# Altium PCB ledcube8x8x8.PcbDoc
Units mil, origin at the board's own origin, x right, y up, seen from the top; angles counter-clockwise.
Board outline 3840 x 2665 mil, 2 copper layers (Top Layer, Bottom Layer); 126 components, 182 nets, 509 pads, 79 vias.
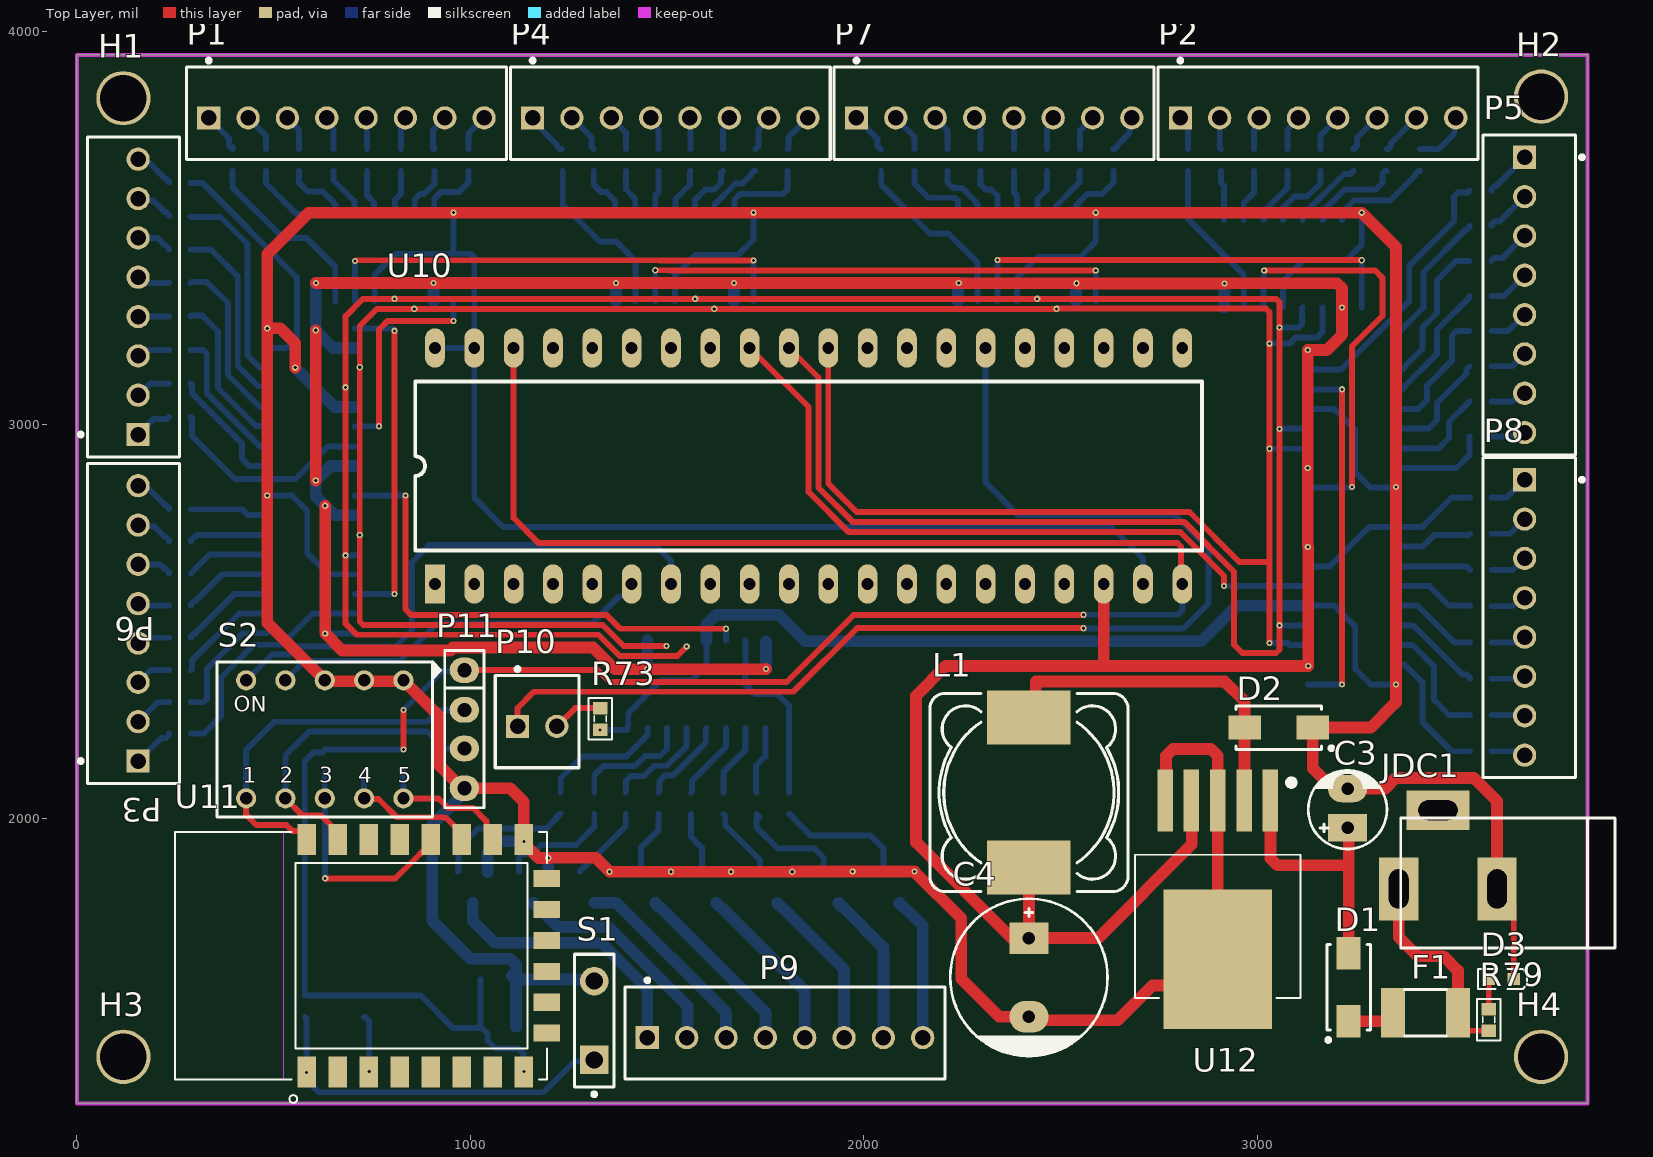
[diagram p0: Top Layer view]
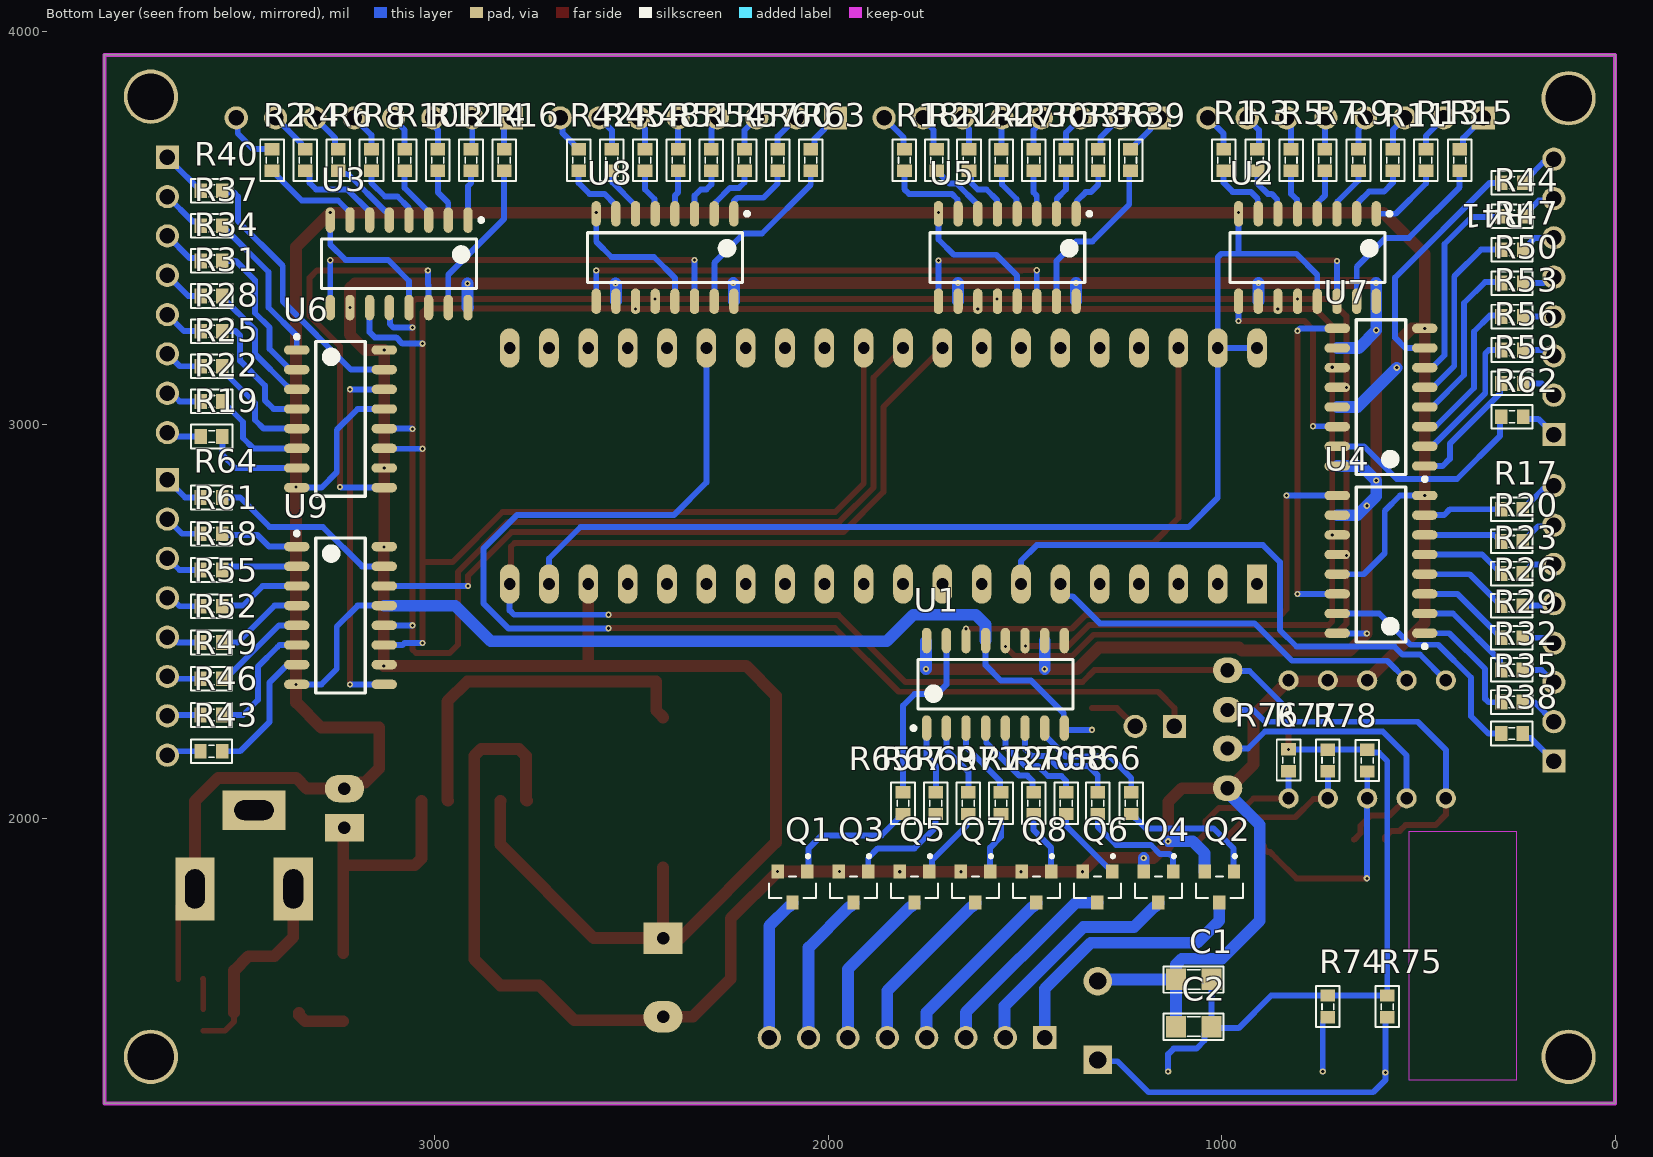
[diagram p1: Bottom Layer view, seen from below]
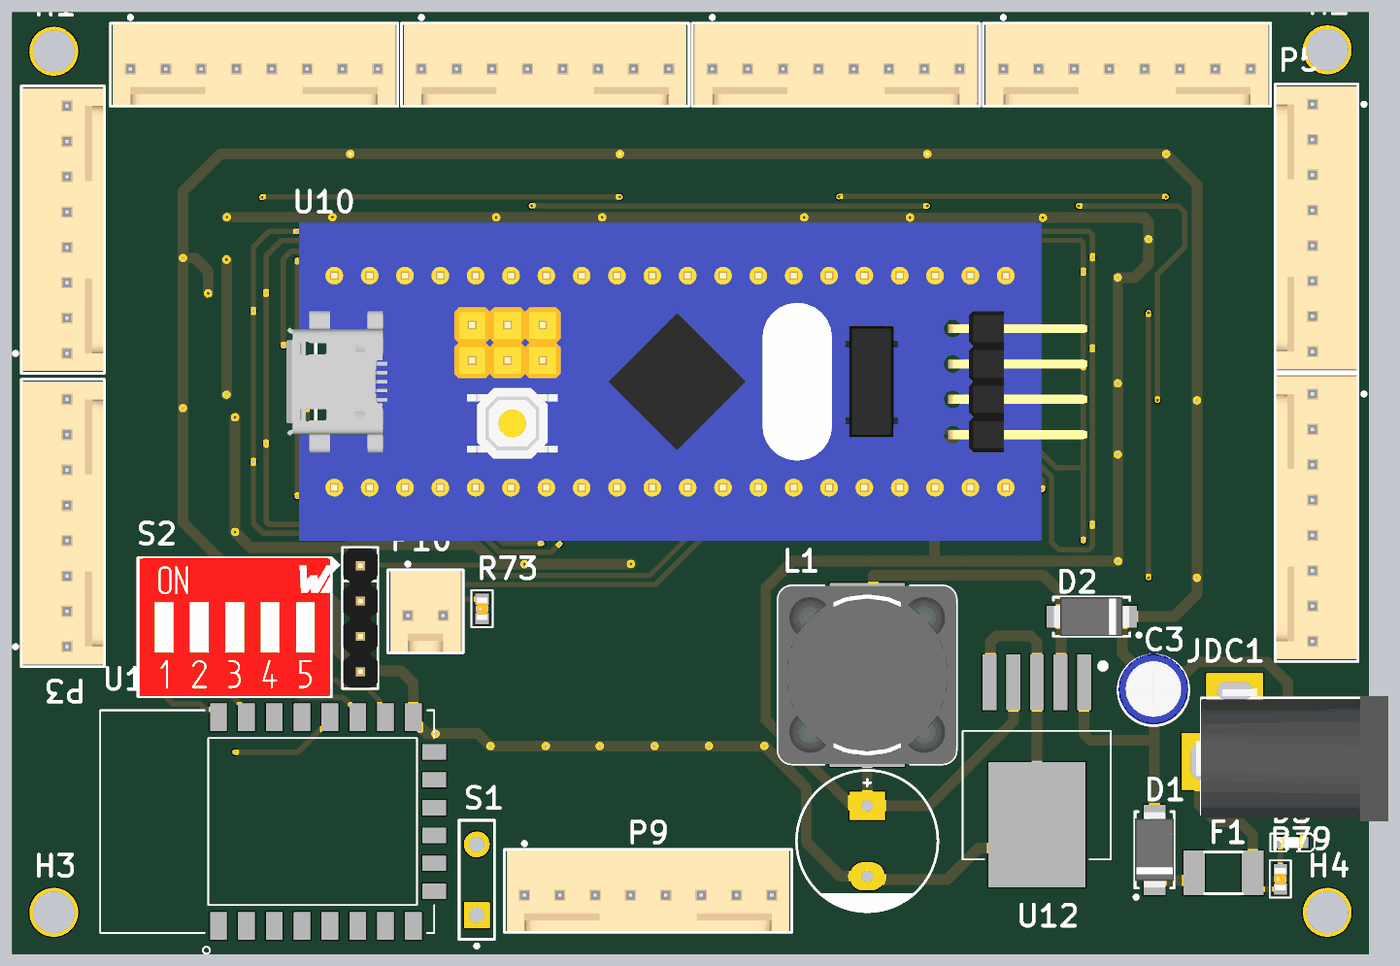
[diagram p2: 3D render of the assembled board from above, using the file's embedded part models]
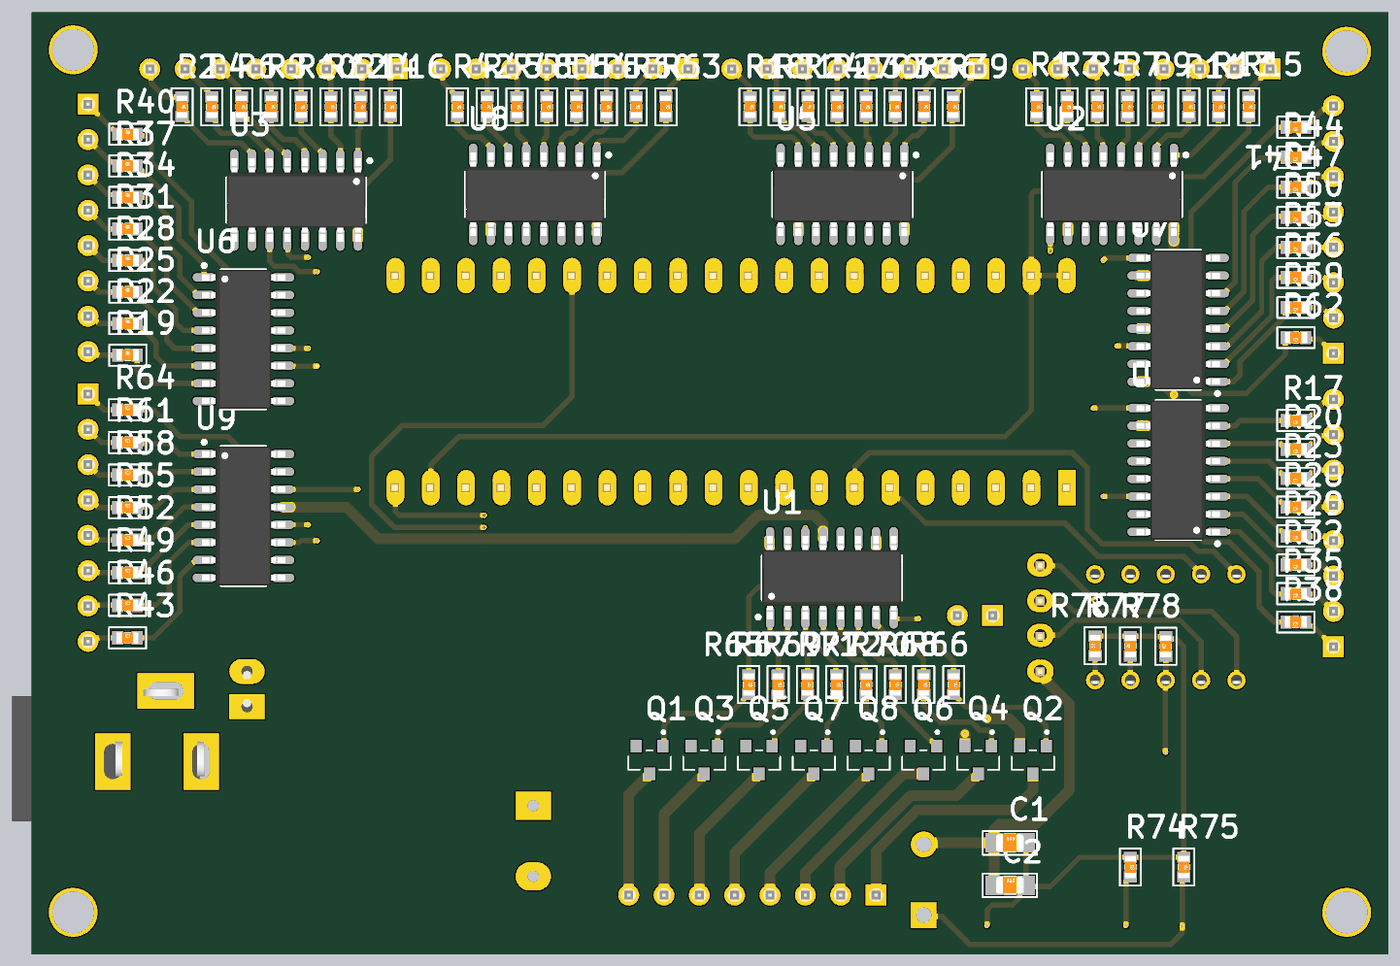
[diagram p3: 3D render of the assembled board from below, using the file's embedded part models]

## Layer stack, top to bottom
Top Solder: solder mask 0.4, Solder Resist, Dk 3.5
Top Layer: signal copper 1.4
Dielectric 1: dielectric 12.6, FR-4, Dk 4.8
Bottom Layer: signal copper 1.4
Bottom Solder: solder mask 0.4, Solder Resist, Dk 3.5

## Board outline
0,1275 0,3940 3840,3940 3840,1275

## Design rules (kind name [scope] priority, off if disabled: settings)
Clearance [All] p1: gap=10 ignorepadtopadclearanceinfootprint=FALSE
PolygonConnect [All] p1: connectstyle=Relief reliefconductorwidth=10 reliefentries=4 polygonreliefangle="90 Angle" airgapwidth=10
RoutingVias [All] p1: holewidth=7.87 width=15.75 viastyle="Through Hole" minholewidth=0 minwidth=7.87 maxholewidth=28 maxwidth=50
SolderMaskExpansion [All] p1: expansion=4 istentingtop=FALSE
Width [All] p1: maxlimit=30 minlimit=8 preferedwidth=15
30 further rules are at their usual default settings.

## Classes and differential pairs
component class power_supply: C3 C4 D1 D2 D3 F1 JDC1 L1 R79 U12
component class esp8266: C1 C2 IC*1 P11 R74 R75 R76 R77 R78 S1 S2 U11
component class ledcube8x8x8: H1 H2 H3 H4 P1 P2 P3 P4 P5 P6 P7 P8 P9 P10 Q1 Q2 Q3 Q4 Q5 Q6 Q7 Q8 R1 R2 R3 R4 R5 R6 R7 R8 R9 R10 R11 R12 R13 R14 R15 R16 R17 R18 R19 R20 R21 R22 R23 R24 R25 R26 R27 R28 R29 R30 R31 R32 R33 R34 R35 R36 R37 R38 R39 R40 R41 R42 R43 R44 R45 R46 R47 R48 R49 R50 R51 R52 R53 R54 R55 R56 R57 R58 R59 R60 R61 R62 R63 R64 R65 R66 R67 R68 R69 R70 R71 R72 R73 U1 U2 U3 U4 U5 U6 U7 U8 U9 U10

## Components (designator, comment, footprint, x,y, rotation, side; value= is the part's Value field where it differs from the comment)
C1 "Cap Non-Pol SMD" CAP-SM-0805 1115.94,1590 r180 bottom value=100nF
C2 "Cap Non-Pol SMD" CAP-SM-0805 1115.94,1470 r180 bottom value=1uF
C3 "Cap Pol" CP1/2 3230,1975 r90 top value=100uF
C4 "Cap Pol" CP2/4 2420,1695 r270 top value=1000uF
D1 "D Schottky" SS34 3233,1570 r90 top
D2 "D Schottky" SS34 3055,2230 r180 top
D3 "LED SMD" LED_0603_Blue 3621,1591 r0 top
F1 "Fuse" "FUSE SMD" 3428,1505 r180 top
H1 "Hole" "LO KHOAN 3MM" 118.11,3830 r0 top
H2 "Hole" "LO KHOAN 3MM" 3721.89,3834.06 r0 top
H3 "Hole" "LO KHOAN 3MM" 118.11,1393.11 r0 top
H4 "Hole" "LO KHOAN 3MM" 3721.89,1393.11 r0 top
JDC1 "Jack DC" DC-IN 3485,1920 r180 top value="Jac DC"
L1 "Inductor" "INDUCTOR 12.5x12.5" 2420,2065 r270 top value=100uH
P1 "61900811121" 61900811121 685,3791.81 r180 top
P2 "61900811121" 61900811121 3155,3791.81 r180 top
P3 "61900811121" 61900811121 143.7,2495 r270 top
P4 "61900811121" 61900811121 1508.33,3791.81 r180 top
P5 "61900811121" 61900811121 3691.81,3330 r90 top
P6 "61900811121" 61900811121 143.7,3325 r270 top
P7 "61900811121" 61900811121 2331.67,3791.81 r180 top
P8 "61900811121" 61900811121 3691.81,2510 r90 top
P9 "61900811121" 61900811121 1800,1453.81 r180 top
P10 "61900211121" 61900211121 1170,2245 r180 top
P11 "Header 4" JP4 985,2276 r270 top
Q1 "MMSS8050-H-TP" TRANS_MMSS8050-H-TP 2090.94,1824.37 r270 bottom
Q2 "MMSS8050-H-TP" TRANS_MMSS8050-H-TP 1005.94,1824.37 r270 bottom
Q3 "MMSS8050-H-TP" TRANS_MMSS8050-H-TP 1935.94,1824.37 r270 bottom
Q4 "MMSS8050-H-TP" TRANS_MMSS8050-H-TP 1160.94,1824.37 r270 bottom
Q5 "MMSS8050-H-TP" TRANS_MMSS8050-H-TP 1780.94,1824.37 r270 bottom
Q6 "MMSS8050-H-TP" TRANS_MMSS8050-H-TP 1315.94,1824.37 r270 bottom
Q7 "MMSS8050-H-TP" TRANS_MMSS8050-H-TP 1625.94,1824.37 r270 bottom
Q8 "MMSS8050-H-TP" TRANS_MMSS8050-H-TP 1470.94,1824.37 r270 bottom
R1 "RESISTOR SMD" RES-SM-0603 995,3700 r270 bottom value=220
R2 "RESISTOR SMD" RES-SM-0603 3414,3700 r270 bottom value=220
R3 "RESISTOR SMD" RES-SM-0603 909.29,3700 r270 bottom value=220
R4 "RESISTOR SMD" RES-SM-0603 3329.71,3700 r270 bottom value=220
R5 "RESISTOR SMD" RES-SM-0603 823.57,3700 r270 bottom value=220
R6 "RESISTOR SMD" RES-SM-0603 3245.43,3700 r270 bottom value=220
R7 "RESISTOR SMD" RES-SM-0603 737.86,3700 r270 bottom value=220
R8 "RESISTOR SMD" RES-SM-0603 3161.14,3700 r270 bottom value=220
R9 "RESISTOR SMD" RES-SM-0603 652.14,3700 r270 bottom value=220
R10 "RESISTOR SMD" RES-SM-0603 3076.86,3700 r270 bottom value=220
R11 "RESISTOR SMD" RES-SM-0603 565,3700 r270 bottom value=220
R12 "RESISTOR SMD" RES-SM-0603 2992.57,3700 r270 bottom value=220
R13 "RESISTOR SMD" RES-SM-0603 480.71,3700 r270 bottom value=220
R14 "RESISTOR SMD" RES-SM-0603 2908.29,3700 r270 bottom value=220
R15 "RESISTOR SMD" RES-SM-0603 395,3700 r270 bottom value=220
R16 "RESISTOR SMD" RES-SM-0603 2824,3700 r270 bottom value=220
R17 "RESISTOR SMD" RES-SM-0603 235,2785 r0 bottom value=220
R18 "RESISTOR SMD" RES-SM-0603 1806.52,3700 r270 bottom value=220
R19 "RESISTOR SMD" RES-SM-0603 3595,2970 r180 bottom value=220
R20 "RESISTOR SMD" RES-SM-0603 235,2703.33 r0 bottom value=220
R21 "RESISTOR SMD" RES-SM-0603 1724.38,3700 r270 bottom value=220
R22 "RESISTOR SMD" RES-SM-0603 3595,3059.29 r180 bottom value=220
R23 "RESISTOR SMD" RES-SM-0603 235,2621.67 r0 bottom value=220
R24 "RESISTOR SMD" RES-SM-0603 1642.24,3700 r270 bottom value=220
R25 "RESISTOR SMD" RES-SM-0603 3595,3148.57 r180 bottom value=220
R26 "RESISTOR SMD" RES-SM-0603 235,2540 r0 bottom value=220
R27 "RESISTOR SMD" RES-SM-0603 1560.1,3700 r270 bottom value=220
R28 "RESISTOR SMD" RES-SM-0603 3595,3237.86 r180 bottom value=220
R29 "RESISTOR SMD" RES-SM-0603 235,2458.33 r0 bottom value=220
R30 "RESISTOR SMD" RES-SM-0603 1477.95,3700 r270 bottom value=220
R31 "RESISTOR SMD" RES-SM-0603 3595,3327.14 r180 bottom value=220
R32 "RESISTOR SMD" RES-SM-0603 235,2376.67 r0 bottom value=220
R33 "RESISTOR SMD" RES-SM-0603 1395.81,3700 r270 bottom value=220
R34 "RESISTOR SMD" RES-SM-0603 3595,3416.43 r180 bottom value=220
R35 "RESISTOR SMD" RES-SM-0603 235,2295 r0 bottom value=220
R36 "RESISTOR SMD" RES-SM-0603 1313.67,3700 r270 bottom value=220
R37 "RESISTOR SMD" RES-SM-0603 3595,3505.71 r180 bottom value=220
R38 "RESISTOR SMD" RES-SM-0603 235,2215 r0 bottom value=220
R39 "RESISTOR SMD" RES-SM-0603 1231.53,3700 r270 bottom value=220
R40 "RESISTOR SMD" RES-SM-0603 3595,3595 r180 bottom value=220
R41 "RESISTOR SMD" RES-SM-0603 234.44,3615 r0 bottom value=220
R42 "RESISTOR SMD" RES-SM-0603 2634.52,3700 r270 bottom value=220
R43 "RESISTOR SMD" RES-SM-0603 3595.44,2170 r180 bottom value=220
R44 "RESISTOR SMD" RES-SM-0603 234.44,3530 r0 bottom value=220
R45 "RESISTOR SMD" RES-SM-0603 2550.24,3700 r270 bottom value=220
R46 "RESISTOR SMD" RES-SM-0603 3595.44,2262.14 r180 bottom value=220
R47 "RESISTOR SMD" RES-SM-0603 234.44,3445 r0 bottom value=220
R48 "RESISTOR SMD" RES-SM-0603 2465.95,3700 r270 bottom value=220
R49 "RESISTOR SMD" RES-SM-0603 3595.44,2354.29 r180 bottom value=220
R50 "RESISTOR SMD" RES-SM-0603 234.44,3360 r0 bottom value=220
R51 "RESISTOR SMD" RES-SM-0603 2381.67,3700 r270 bottom value=220
R52 "RESISTOR SMD" RES-SM-0603 3595.44,2446.43 r180 bottom value=220
R53 "RESISTOR SMD" RES-SM-0603 234.44,3275 r0 bottom value=220
R54 "RESISTOR SMD" RES-SM-0603 2297.38,3700 r270 bottom value=220
R55 "RESISTOR SMD" RES-SM-0603 3595.44,2538.57 r180 bottom value=220
R56 "RESISTOR SMD" RES-SM-0603 234.44,3190 r0 bottom value=220
R57 "RESISTOR SMD" RES-SM-0603 2213.1,3700 r270 bottom value=220
R58 "RESISTOR SMD" RES-SM-0603 3595.44,2630.71 r180 bottom value=220
R59 "RESISTOR SMD" RES-SM-0603 234.44,3105 r0 bottom value=220
R60 "RESISTOR SMD" RES-SM-0603 2128.81,3700 r270 bottom value=220
R61 "RESISTOR SMD" RES-SM-0603 3595.44,2722.86 r180 bottom value=220
R62 "RESISTOR SMD" RES-SM-0603 234.44,3020 r0 bottom value=220
R63 "RESISTOR SMD" RES-SM-0603 2044.52,3700 r270 bottom value=220
R64 "RESISTOR SMD" RES-SM-0603 3595.44,2815 r180 bottom value=220
R65 "RESISTOR SMD" RES-SM-0603 1810.16,2065 r270 bottom value=1K
R66 "RESISTOR SMD" RES-SM-0603 1230,2065 r270 bottom value=1K
R67 "RESISTOR SMD" RES-SM-0603 1727.13,2065 r270 bottom value=1K
R68 "RESISTOR SMD" RES-SM-0603 1315,2065 r270 bottom value=1K
R69 "RESISTOR SMD" RES-SM-0603 1644.09,2065 r270 bottom value=1K
R70 "RESISTOR SMD" RES-SM-0603 1395,2065 r270 bottom value=1K
R71 "RESISTOR SMD" RES-SM-0603 1561.06,2065 r270 bottom value=1K
R72 "RESISTOR SMD" RES-SM-0603 1478.03,2065 r270 bottom value=1K
R73 "RESISTOR SMD" RES-SM-0603 1330,2225 r90 top value=10K
R74 "RESISTOR SMD" RES-SM-0603 730,1548.47 r270 bottom value=10K
R75 "RESISTOR SMD" RES-SM-0603 579,1548.47 r270 bottom value=10K
R76 "RESISTOR SMD" RES-SM-0603 830,2120 r90 bottom value=10K
R77 "RESISTOR SMD" RES-SM-0603 730,2119.44 r90 bottom value=10K
R78 "RESISTOR SMD" RES-SM-0603 630,2118.88 r90 bottom value=10K
R79 "RESISTOR SMD" RES-SM-0603 3589,1460 r90 top value=1K
S1 "SW-PB" SPST-2 1315,1485.44 r90 top
S2 "418117170905" 418117170905 630,2200 r0 top
U1 "74HC595" 74HC595D 1575,2340 r90 bottom
U2 "74HC595" 74HC595D 782,3425 r270 bottom
U3 "74HC595" 74HC595D 3091,3409 r270 bottom
U4 "74HC595" 74HC595D 595,2645 r0 bottom
U5 "74HC595" 74HC595D 1545,3425 r270 bottom
U6 "74HC595" 74HC595D 3240,3015 r180 bottom
U7 "74HC595" 74HC595D 595,3070 r0 bottom
U8 "74HC595" 74HC595D 2415,3425 r270 bottom
U9 "74HC595" 74HC595D 3240,2515 r180 bottom
U10 "Bluepill" BLUEPILL 910,2595 r90 top
U11 "ESP8266-12E/ESP-12E" XCVR_ESP8266-12E/ESP-12E 860,1650 r90 top
U12 "LM2576-5.0WU" DPAK6P170_1524X459L254X81N 2900,1795 r180 top

## Footprints (in the part's own frame and the unit in brackets; to place one, negate y for a bottom-side part, rotate by r counter-clockwise, add the part's x,y. Pads: shape width x height; smd on the part's side, far side on the other; paste and mask are expansions set on the pad)
74HC595D [mm] "SOIC, 16-Leads, Body 9.90x3.90mm, Pitch 1.27mm, IPC Medium Density"
  oval 1.65x0.6 smd: 1(-2.825,4.445) 2(-2.825,3.175) 3(-2.825,1.905) 4(-2.825,0.635) 5(-2.825,-0.635) 6(-2.825,-1.905) 7(-2.825,-3.175) 8(-2.825,-4.445) 9(2.825,-4.445) 10(2.825,-3.175) 11(2.825,-1.905) 12(2.825,-0.635) 13(2.825,0.635) 14(2.825,1.905) 15(2.825,3.175) 16(2.825,4.445)
  silkscreen extent -2.95,-5 1.6,5.42, body extent -3,-5 3,5, height 1.75
61900211121 [mm] "2.54mm Male Locking Header, 2p"
  rect 1.5x1.5 hole 1: 1(1.27,0.3)
  round 1.5 hole 1: 2(-1.27,0.3)
  silkscreen extent -2.71,-3.52 2.71,2.98, body extent -2.54,-2.9 2.54,2.9, height 11.53
61900811121 [mm] "2.54mm Male Locking Header, 8p"
  rect 1.5x1.5 hole 1: 1(8.89,0.3)
  round 1.5 hole 1: 2(6.35,0.3) 3(3.81,0.3) 4(1.27,0.3) 5(-1.27,0.3) 6(-3.81,0.3) 7(-6.35,0.3) 8(-8.89,0.3)
  silkscreen extent -10.33,-3.52 10.33,2.98, body extent -10.16,-2.9 10.16,2.9, height 11.53
418117170905 [mm] "2.54 mm compact THT with flat actuator, 5p"
  round 1.3 hole 0.8: 1(-5.08,-3.81) 2(-2.54,-3.81) 3(0,-3.81) 4(2.54,-3.81) 5(5.08,-3.81) 6(5.08,3.81) 7(2.54,3.81) 8(0,3.81) 9(-2.54,3.81) 10(-5.08,3.81)
  silkscreen extent -6.95,-5 6.95,5, body extent -6.85,-4.95 6.85,4.95, height 5.75
BLUEPILL [mil]
  rect 100x50 hole 30: 1(0,0)
  oval 100x50 hole 30: 2(0,-100) 3(0,-200) 4(0,-300) 5(0,-400) 6(0,-500) 7(0,-600) 8(0,-700) 9(0,-800) 10(0,-900) 11(0,-1000) 12(0,-1100) 13(0,-1200) 14(0,-1300) 15(0,-1400) 16(0,-1500) 17(0,-1600) 18(0,-1700) 19(0,-1800) 20(0,-1900) 21(600,-1900) 22(600,-1800) 23(600,-1700) 24(600,-1600) 25(600,-1500) 26(600,-1400) 27(600,-1300) 28(600,-1200) 29(600,-1100) 30(600,-1000) 31(600,-900) 32(600,-800) 33(600,-700) 34(600,-600) 35(600,-500) 36(600,-400) 37(600,-300) 38(600,-200) 39(600,-100) 40(600,0)
  silkscreen extent 85,-1950 515,50, body extent -150,-2133 750,133, height 485
CAP-SM-0805 [mil]
  rect 50x55 smd: 1(0,0) 2(90,0)
  silkscreen extent -32,-34 121,33, body extent 6,-25 84,25, height 31
CP1/2 [mil] "Tu hoa < 22uF/16>50V"
  rect 70x100 hole 32: 1(0,0)
  oval 70x100 hole 32: 2(100,0)
  silkscreen extent -53,-100 146,100, body extent -49,-99 149,99, height 287
CP2/4 [mil] "Tu hoa 1000uF/16V/25V"
  rect 80x100 hole 32: 1(0,0)
  oval 80x100 hole 32: 2(200,0)
  silkscreen extent -100,-200 300,200
DC-IN [mil] "Jac DC input"
  rect 100x160 hole 50 slot 100 at 90 deg: 1(125,100) 2(-125,100)
  rect 160x100 hole 50 slot 100 at 0 deg: 3(25,-100)
  silkscreen extent -425,-80 120,250, body extent -410,-105 134,269, height 434
DPAK6P170_1524X459L254X81N [mm]
  rect 1x4 smd: 1(-3.4,-6.33) 2(-1.7,-6.33) 3(0,-6.33) 4(1.7,-6.33) 5(3.4,-6.33)
  rect 7x9 smd: 6(0,3.91)
  silkscreen extent -5.33,-7.7 5.33,6.4
"FUSE SMD" [mm] "SMD FUSE"
  rect 1.55x3.21 smd: 1(-2.1,0) 2(2.1,0)
  silkscreen extent -1.35,-1.5 1.35,1.51, body extent -2.37,-1.71 2.36,1.71, height 0.75
"INDUCTOR 12.5x12.5" [mm] "SMD Inductor  Body Width 12.5mm Body Lenght 12.5mm Height 8mm"
  rect 3.5x5.4 smd: 1(-4.85,0) 2(4.85,0)
  silkscreen extent -6.4,-6.4 6.4,6.4, body extent -6.4,-6.4 6.4,6.4, height 8
JP4 [mil] "Jumper 4"
  oval 65x75 hole 36: 1(-100,0) 2(1,0) 3(99,0) 4(200,0)
  silkscreen extent -150,-81 250,50, body extent -148,-48 248,50, height 323
LED_0603_Blue [mm] "Chip LED, 2-Leads, Body 1.6x0.8mm, IPC Medium Density"
  rect 0.8x0.8 smd: 1(-0.8,0) 2(0.8,0)
  silkscreen extent -1.52,-0.64 1.65,0.64, body extent -0.8,-0.4 0.8,0.4, height 0.7
"LO KHOAN 3MM" [mil]
  round 138 hole 118.1: 1(0,0)
RES-SM-0603 [mm]
  rect 0.8x0.95 smd: 1(-0.014,0) 2(1.386,0)
  silkscreen extent -0.64,-0.76 2.03,0.76, body extent -0.11,-0.4 1.49,0.4, height 0.3
SPST-2 [mm] "Switch; 2 Leads"
  rect 1.85x1.85 hole 1.1: 1(-2.54,0)
  round 1.85 hole 1.1: 2(2.54,0)
  silkscreen extent -4.89,-1.27 4.28,1.27
SS34 [mm] "DO-214-AC/SMA Molded Diode, Body 5.3x2.6mm, IPC Medium Density"
  rect 2.1x1.55 smd: 1(-2.2,0) 2(2.2,0)
  silkscreen extent -3.52,-1.4 2.75,1.45, body extent -2.75,-1.4 2.75,1.4, height 2.3
TRANS_MMSS8050-H-TP [mm]
  rect 0.9x0.8 smd: 1(-1,0.95) 2(-1,-0.95) 3(1,0)
  silkscreen extent -2.1,-1.52 0.7,1.52
XCVR_ESP8266-12E/ESP-12E [mm]
  rect 2x1.2 smd: 1(-7.5,7) 2(-7.5,5) 3(-7.5,3) 4(-7.5,1) 5(-7.5,-1) 6(-7.5,-3) 7(-7.5,-5) 8(-7.5,-7) 15(7.5,-7) 16(7.5,-5) 17(7.5,-3) 18(7.5,-1) 19(7.5,1) 20(7.5,3) 21(7.5,5) 22(7.5,7)
  rect 1.1x1.7 smd: 9(-5,-8.5) 10(-3,-8.5) 11(-1,-8.5) 12(1,-8.5) 13(3,-8.5) 14(5,-8.5)
  Keep-Out Layer region: 8,8.51 -8.009,8.51 -8.009,15.5 8,15.5
  Keep-Out Layer region: 8,8.51 -8.009,8.51 -8.009,15.5 8,15.5
  silkscreen extent -9.5,-8.5 8,15.5

## Part data
C1 C2: "Capacitor"
C3 C4: "Polarized Capacitor (Radial)"
D1 D2: "Schottky Diode", Code_JEDEC=DO-214-AA, LatestRevisionDate=17-Jul-2002, LatestRevisionNote="Re-released for DXP Platform.", PackageDescription="DO-214-AA/SMB; 2 C-Bend Leads; Body 5.3 x 3.6 mm, inc. leads (LxW)", PackageReference=SMB, Published=8-Jun-2000, Publisher="Altium Limited"
D3: "LED"
H1 H2 H3 H4: "Hole 3mm"
JDC1: "Jack DC input"
P1 P2 P3 P4 P5 P6 P7 P8 P9: "WR-WTB THT Male Vertical Locking Header, pitch 2.54mm, 8p", Contact Resistance=20mOhm, Operating Temperature="-40 to +105degC", Rated Current=3A, Withstanding Voltage=1000VAC, Working Voltage=250VAC, ComponentLink1Description=Manufacturer, ComponentLink1URL=http://www.we-online.de, ComponentLink2Description=Datasheet, ComponentLink2URL=https://www.we-online.com/catalog/datasheet/61900811121.pdf, Gender=Male, Mounting Technology=THT, Packaging=Bag, Part Number=61900811121, Pin Number=8, Pitch=2.54mm, Published Date="January 2020", Publisher="Wurth Elektronik", Type=Vertical
P10: "WR-WTB THT Male Vertical Locking Header, pitch 2.54mm, 2p", Contact Resistance=20mOhm, Operating Temperature="-40 to +105degC", Rated Current=3A, Withstanding Voltage=1000VAC, Working Voltage=250VAC, ComponentLink1Description=Manufacturer, ComponentLink1URL=http://www.we-online.de, ComponentLink2Description=Datasheet, ComponentLink2URL=https://www.we-online.com/catalog/datasheet/61900211121.pdf, Gender=Male, Mounting Technology=THT, Packaging=Bag, Part Number=61900211121, Pin Number=2, Pitch=2.54mm, Published Date="January 2020", Publisher="Wurth Elektronik", Type=Vertical
P11: "Header, 4-Pin", LatestRevisionDate=17-Jul-2002, LatestRevisionNote="Re-released for DXP Platform.", Publisher="Altium Limited"
Q1 Q2 Q3 Q4 Q5 Q6 Q7 Q8: "Bipolar _BJT_ Transistor NPN 25V 1.5A 100MHz 625mW Surface Mount SOT-23", Package="SOT-23 Micro Commercial", Availability=Unavailable, MF="Micro Commercial", MP=MMSS8050-H-TP, Price=None, SnapEDA_Link=https://www.snapeda.com/parts/MMSS8050-H-TP/Micro%20Commercial/view-part/423878/?ref=snap
R1 R2 R3 R4 R5 R6 R7 R8 R9 R10 R11 R12 R13 R14 R15 R16 R17 R18 R19 R20 R21 R22 R23 R24 R25 R26 R27 R28 R29 R30 R31 R32 R33 R34 R35 R36 R37 R38 R39 R40 R41 R42 R43 R44 R45 R46 R47 R48 R49 R50 R51 R52 R53 R54 R55 R56 R57 R58 R59 R60 R61 R62 R63 R64 R65 R66 R67 R68 R69 R70 R71 R72 R73 R74 R75 R76 R77 R78 R79: "Resistor"
S1: "Switch", LatestRevisionDate=17-Jul-2002, LatestRevisionNote="Re-released for DXP Platform.", PackageDescription="Switch; 2 Leads", PackageReference=SPST-2, Published=24-Mar-1999, Publisher="Altium Limited"
S2: "WS-DITV Compact THT Dip Switch, Flat Actuator, pitch 2.54mm, 5p", Operating Temperature="-40 to +85degC", Rated Current Non-Switching=100mA, Rated Current Switching=25mA, Rated Voltage Non-Switching=50VDC, Rated Voltage Switching=24VDC, Actuator Type="Flat Type", Circuit=SPST-NO, ComponentLink1Description=Manufacturer, ComponentLink1URL=http://www.we-online.de, ComponentLink2Description=Datasheet, ComponentLink2URL=https://katalog.we-online.com/em/datasheet/418117170905.pdf, Contact Material="Copper Alloy", Contact Plating=Gold, Mounting Technology=THT, Operation Force=800g, Packaging=Tube, Part Number=418117170905, Pitch=2.54mm, Pole Number=5, Published Date="September 2019", Publisher="Wurth Elektronik"
U1 U2 U3 U4 U5 U6 U7 U8 U9: library part 74HC595D
U10: library part BLUEPILL
U11: "ESP-12E WiFi Module", Package=None, Availability=Unavailable, MP=ESP8266-12E/ESP-12E, Price=None
U12: "Buck Switching Regulator IC Positive Fixed 5V 1 Output 3A TO-263-6, DÂ²Pak _5 Leads + Tab_, TO-263BA", Package="TO-263-5 Micrel", Availability=Unavailable, MF=Microchip, MP=LM2576-5.0WU, Price=None, SnapEDA_Link=https://www.snapeda.com/parts/LM2576-5.0WU/Microchip/view-part/104848/?ref=snap

## Via types
v1: diameter 15.75, hole 7.87, Top Layer to Bottom Layer, 79 vias

## Nets (pads, with @x,y where several pads share a name; then routed paths per layer and width w, separated by ;. In a path a pad name is that pad's centre, name@x,y a point inside that pad or via, vN(x,y) a via of type N, cw(c..) or ccw(c..) an arc to the next point about the centre after c; other vN are vias at no path point)
3V3: C1.2 C2.2 P11.1 R74.1 R75.1 R76.2 R77.2 R78.2 U10.20 U10.38 U11.8 | length 6188
  Top Layer w15: v1@830,2174.76 v1(830,2275) ; P11.1 1324.04,2376 1353.96,2346.07 1804.07,2346.07 1974,2516 2558,2516 v1(2559,2517) ; U10.38 1110,2763 1174,2699 2797.75,2699 2806.54,2690.21 2806.54,2611.24 2810,2607.77 U10.20
  Bottom Layer w15: v1(830,2174.56) 655.56,2174.56 655,2174 630.56,2174 R78.2 623.25,2166.69 600.49,2166.69 579,2145.2 R75.1 R74.1 873.97,1549.03 957,1466 1021.94,1466 C2.2 ; v1(830,2275) 929.11,2374.11 983.11,2374.11 P11.1 ; C1.2 C2.2 ; v1(1136,1356) 1136,1400 1122,1414 1064,1414 1043.44,1434.56 1043.44,1452.5 C2.2 ; v1(2559,2517) 2799,2517 2810,2528 U10.20
+5: C4.1 L1.2 U1.10 U1.16 U2.10 U2.16 U3.10 U3.16 U4.10 U4.16 U5.10 U5.16 U6.10 U6.16 U7.10 U7.16 U8.10 U8.16 U9.10 U9.16 U10.18 U12.4 | length 9336
  Top Layer w30: v1(607,2858) v1(607,3240.14) ; v1(608,3360.37) v1(906.65,3360.37) 1369.51,3360.37 v1(1370,3359.87) v1(1670,3359.87) v1(2241.63,3359.87) 2242,3359.5 v1(2541,3359.5) 2541.5,3359 v1(2917,3359) 2917.5,3359.5 3203,3359.5 3216,3346.5 v1(3216,3298) 3216,3229 3176.76,3189.76 v1(3128.78,3189.76) v1@3128.78,2888.22 ; v1(631,2794) 631,2469.66 v1(631.04,2469.62) 674.66,2426 948.68,2426 956.18,2433.5 1312.5,2433.5 1367.43,2378.57 v1(1450,2378.57) 1750.98,2378.57 v1(1751.43,2379.03) ; L1.2 C4.1 ; U10.18 2610,2387 ; U12.4 2834,2043.28 2834,1933 2596,1695 C4.1 ; v1(3128.78,2890) v1@3128.78,2888.22 ; C4.1 2376,1695 2133,1938 2133,2311 2209,2387 2610,2387 ; 2610,2387 v1(3130,2387) 3130,2688 v1(3129,2689) 3129,2888 v1@3128.78,2888.22
  Bottom Layer w15: v1(631.04,2469.62) 705.84,2469.62 U4.16
  Bottom Layer w30: v1(608,3360.37) 607,3359.37 U2.16 v1(607,3240.14) 652.14,3195 U7.10 ; U4.10 655,2770 v1(631,2794) 607,2818 v1(607,2858) 644,2895 U7.16 ; v1(906.65,3360.37) 906.65,3314.13 U2.10 ; U5.16 v1(1370,3359.87) ; v1(1450,2378.57) U1.10 ; U5.10 v1(1670,3359.87) ; v1(1751.43,2379.03) U1.16@1751.43,2449.79 ; U8.16 2240,3358.25 v1(2241.63,3359.87) ; U8.10 2540,3358.5 v1(2541,3359.5) ; U3.16 2917,3298.78 v1(2917,3359)
CLK: U1.11 U2.11 U3.11 U4.11 U5.11 U6.11 U7.11 U8.11 U9.11 U10.30 | length 6687.6
  Top Layer w15: v1(1499,2437.37) 1389.94,2437.37 1336.32,2491 727.79,2491 719,2499.79 v1(719,2720) v1(719,3146) 719,3251 762.63,3294.63 v1(857.37,3294.63) v1(1620,3294.63) v1(2490,3294.63) 2490.37,3295 3022.84,3295 3031.63,3286.21 v1(3031.63,3206) v1(3031.63,2939) 3031.63,2651 ; U10.30 1910,2850.36 1982.36,2778 2828,2778 2955,2651 3031.63,2651 ; v1(3031.63,2444.87) 3031.63,2651
  Bottom Layer w15: v1(3031.63,2444.87) 3077.13,2444.87 3082,2440 U9.11 ; v1(3031.63,2939) 3127.78,2939 U6.11 ; v1(3031.63,3206) 3082.66,3206 3098.66,3222 3152.99,3222 3166,3235.01 U3.11
GND: C1.1 C2.1 C3.2 C4.2 D2.1 D3.2 JDC1.2 P11.4 Q1.2 Q2.2 Q3.2 Q4.2 Q5.2 Q6.2 Q7.2 Q8.2 R73.1 S1.2 S2.6 S2.7 S2.8 U1.8 U1.13 U2.8 U2.13 U3.8 U3.13 U4.8 U4.13 U5.8 U5.13 U6.8 U6.13 U7.8 U7.13 U8.8 U8.13 U9.8 U9.13 U10.19 U10.39 U10.40 U11.15 U12.3 U12.5 U12.6 | length 19076.7
  Top Layer w15: JDC1.2 3652.5,1777.5 D3.2
  Top Layer w30: v1(555,3145) 555,3207 517,3245 v1(483.78,3245) ; S2.6 S2.6@832.03,2347.97 ; U11.15 1135.59,1929.53 1144.21,1920.91 1151.7,1920.91 1174.06,1898.54 v1(1198.35,1898.54) 1198.8,1899 1318.74,1899 v1(1354,1863.74) v1(1510,1863.74) v1(1663,1863.74) v1(1818.35,1863.74) 1818.74,1863.74 1819,1864 v1(1972,1864) v1(2129,1864) 2248,1745 2248,1591 2344,1495 C4.2 ; U11.15@1143.6,1953.29 1135.59,1961.3 1135.59,2041.41 1101,2076 P11.4 980,2076 919.04,2136.96 919.04,2260.96 S2.6@832.03,2347.97 ; C4.2@2429,1486 2646,1486 2734.78,1574.78 2833.72,1574.78 U12.6 2900,2158.43 2882.43,2176 2786.28,2176 2768.71,2158.43 2768.71,2046.78 U12.5 ; JDC1.2 3610,2043 3551,2102 3353,2102 3326,2075 C3.2 3204.18,2075 3188.61,2090.57 3177.43,2090.57 3141.61,2126.39 D2.1 3289,2230 3353,2294 v1(3353,2340) v1(3353,2842) 3353,3452 v1(3266,3539) v1(2590,3539) v1(1720,3539) v1(957,3539) 589,3539 483.78,3433.78 v1(483.78,3245) ; v1(483.78,3245) v1(483.78,2820) 483.78,2496.22 S2.8 632.03,2347.97 S2.6@832.03,2347.97
  Bottom Layer w15: v1(483.78,2820) 546.49,2820 585.49,2781 585.49,2673 638.49,2620 U4.13 ; U2.13 757,3381.51 810,3434.51 957,3434.51 ; U10.40 U10.39 ; v1(957,3539) U2.8 957,3434.51 ; v1@1330.24,2224.2 1330.35,2224.3 1331.11,2223.53 1396.02,2223.53 1400,2227.51 U1.8 1401.47,2230.25 1401.47,2266.51 1484.47,2349.51 1561,2349.51 1600,2388.51 U1.13 ; U5.13 1520,3379 1573,3432 1681,3432 1720,3471 U5.8 ; U8.13 2390,3373.44 2443,3426.44 2551,3426.44 2590,3465.44 U8.8 ; U10.19 2710,2660 2630,2740 1084,2740 1010,2814 U10.39 ; U3.13 3066,3365.51 3119,3418.51 3227,3418.51 3266,3457.51 U3.8 ; U9.13 3196.51,2540 3249.51,2487 3249.51,2379 3288.51,2340 U9.8 ; U6.13 3196.51,3040 3249.51,2987 3249.51,2879 3288.51,2840 U6.8 ; 957,3434.51 1001.21,3434.51 1010,3425.72 U10.39
  Bottom Layer w30: v1(555,3145) 655,3045 U7.13 ; P11.4 973.3,2064.3 973.3,2053.3 903,1983 903,1739 999.5,1642.5 1101.5,1642.5 1115.94,1628.06 C1.1 ; Q2.2@1044.09,1862.99 Q2.2 1043.35,1910.85 1073.5,1941 v1(1136,1941) ; C1.1@1105.94,1600 C1.1 ; C2.1 C1.1 ; Q4.2@1198,1863.39 Q4.2 v1(1198.35,1898.54) ; S1.2 1310.44,1590 C1.1 ; U1.13 1600,2492 1625,2517 1784.22,2517 1851.43,2449.79 2858,2449.79 2948.21,2540 U9.13
  other v1: 1330,2224.44
GPIO0: R78.1 S2.3 U11.18 | length 590.3
  Top Layer w15: v1(631,1846.85) 809.95,1846.85 861.75,1898.66 861.75,1898.75 876.41,1913.41 883.25,1913.41 892,1922.16 892,1929 899.37,1936.37 U11.18
  Bottom Layer w15: R78.1 S2.3 631,2049 v1(631,1846.85)
GPIO2: R77.1 S2.4 U11.17 | length 369.6
  Top Layer w15: S2.4 731.64,2048.36 766.37,2048.36 812.59,2002.15 930.24,2002.15 931.39,2001 938.13,2001 978.11,1961.02 U11.17
  Bottom Layer w15: S2.4 R77.1
GPIO15: R76.1 S2.5 U11.16 | length 357.8
  Top Layer w15: S2.5 919.04,2050 943.04,2026 1007,2026 1040.73,1992.27 1040.73,1961.4 U11.16
  Bottom Layer w15: S2.5 R76.1
LATCH: U1.12 U2.12 U3.12 U4.12 U5.12 U6.12 U7.12 U8.12 U9.12 U10.31 | length 7087.9
  Top Layer w15: v1(1550,2436) 1526,2412 1379.96,2412 1325.96,2466 711,2466 683,2494 v1(683,2668) v1(683,3095) 683,3276 727,3320 v1(807,3320) v1(1571.65,3320) v1(2441,3320) 3048.21,3320 3057,3311.21 v1(3057,3247) v1(3057,2989) v1(3057,2490) 3057,2428.29 3048.21,2419.5 2962.5,2419.5 2941.37,2440.63 2941.37,2626.09 2814.46,2753 1972,2753 1885,2840 1885,3120 U10.31
  Bottom Layer w15: v1(683,2668) 704.22,2668 U4.12 ; v1(3057,2490) U9.12 ; v1(3057,2989) 3057.2,2989 3058.2,2990 U6.12 ; v1(3057,3247) 3105.56,3247 3114.35,3255.79 3114.35,3296.13 U3.12
LAYER1: R65.1 U1.15 | length 464.7
  Bottom Layer w15: U1.15 1700,2339 1724,2315 1781,2315 1810,2286 1810,2065.72 R65.1
LAYER2: R67.1 U1.1 | length 173.6
  Bottom Layer w15: R67.1 1726,2066.68 1726,2133 1750,2157 U1.1
LAYER3: R69.1 U1.2 | length 186.4
  Bottom Layer w15: R69.1 1644.09,2118.09 1700,2174 U1.2
LAYER4: R71.1 U1.3 | length 200.1
  Bottom Layer w15: R71.1 1563.97,2068.46 1563.97,2095.02 1650,2181.06 U1.3
LAYER5: R72.1 U1.4 | length 226
  Bottom Layer w15: R72.1 1481.02,2068.55 1481.02,2095.02 1494,2108 1514.97,2108 1598.35,2191.39 1598.35,2227.13 U1.4
LAYER6: R70.1 U1.5 | length 266.4
  Bottom Layer w15: R70.1 1395.56,2066.12 1395.56,2095.02 1407.54,2107 1441.36,2107 1467.36,2133 1500,2133 1550,2183 U1.5
LAYER7: R68.1 U1.6 | length 309
  Bottom Layer w15: R68.1 1315,2109 1338,2132 1418,2132 1444,2158 1482.02,2158 1500,2175.98 U1.6
LAYER8: R66.1 U1.7 | length 319.7
  Bottom Layer w15: R66.1 1230,2102 1285,2157 1396.56,2157 1450,2210.44 U1.7
NetC3_1: C3.1 D1.2 U12.1 | length 672.7
  Top Layer w30: U12.1 3033.86,1897.57 3051.43,1880 3233,1880 ; C3.1 3233,1972 3233,1880 ; D1.2 3233,1880
NetD1_1: D1.1 F1.2 | length 124.9
  Top Layer w30: D1.1 3329.81,1483.39 3345.32,1498.9 F1.2
NetD2_2: D2.2 L1.1 U12.2 | length 903
  Top Layer w30: L1.1 2437.57,2273.52 2437.57,2347 2918,2347 2968.39,2296.61 D2.2 2968.39,2045.67 U12.2
NetD3_1: D3.1 R79.2 | length 76.6
  Top Layer w15: R79.2 3589,1590.5 D3.1
NetP1_1: P1.1 R15.1 | length 107.5
  Bottom Layer w15: P1.1 386.59,3728.41 386.59,3708.81 389.48,3705.91 395,3705.91 R15.1
NetP1_2: P1.2 R13.1 | length 98.4
  Bottom Layer w15: P1.2 480.71,3734.29 R13.1
NetP1_3: P1.3 R11.1 | length 91.9
  Bottom Layer w15: P1.3 535,3779.19 565,3749.19 R11.1
NetP1_4: P1.4 R9.1 | length 86.5
  Bottom Layer w15: P1.4 635,3768.08 652.14,3750.94 R9.1
NetP1_5: P1.5 R7.1 | length 80.6
  Bottom Layer w15: P1.5 737.86,3777.14 R7.1
NetP1_6: P1.6 R5.1 | length 84.2
  Bottom Layer w15: R5.1 823.57,3756.65 835,3768.08 P1.6
NetP1_7: P1.7 R3.1 | length 95.4
  Bottom Layer w15: R3.1 905.51,3700.56 905.51,3749.19 935,3778.67 P1.7
NetP1_8: P1.8 R1.1 | length 96
  Bottom Layer w15: R1.1 995,3740 P1.8
NetP2_1: P2.1 R16.1 | length 87.3
  Bottom Layer w15: P2.1 2824,3761 R16.1
NetP2_2: P2.2 R14.1 | length 80.8
  Bottom Layer w15: P2.2 2905,3703.84 R14.1
NetP2_3: P2.3 R12.1 | length 84.6
  Bottom Layer w15: R12.1 2992.57,3749.19 2996.57,3753.18 2996.57,3771.57 P2.3
NetP2_4: P2.4 R10.1 | length 91.1
  Bottom Layer w15: R10.1 3076.86,3749.19 3105,3777.33 P2.4
NetP2_5: P2.5 R8.1 | length 100.6
  Bottom Layer w15: R8.1 3161.14,3736.14 P2.5 P2.5@3207.14,3777.86
NetP2_6: P2.6 R6.1 | length 104.1
  Bottom Layer w15: R6.1 3253.63,3708.76 3253.63,3728.63 P2.6
NetP2_7: P2.7 R4.1 | length 112.4
  Bottom Layer w15: R4.1 3332.67,3700.56 3340.91,3708.81 3340.91,3715.92 P2.7
NetP2_8: P2.8 R2.1 | length 145.1
  Bottom Layer w15: R2.1 3461.67,3700.56 3501.27,3740.15 3501.27,3776.27 P2.8
NetP3_1: P3.1 R38.1 | length 109.7
  Bottom Layer w15: P3.1 214.31,2203.8 226.19,2203.8 234.44,2212.05 R38.1
NetP3_2: P3.2 R35.1 | length 99.6
  Bottom Layer w15: P3.2 204.98,2294.47 233.91,2294.47 R35.1
NetP3_3: P3.3 R32.1 | length 92
  Bottom Layer w15: P3.3 187.18,2376.67 R32.1
NetP3_4: P3.4 R29.1 | length 84.5
  Bottom Layer w15: P3.4 167.43,2445 180.77,2458.33 R29.1
NetP3_5: P3.5 R26.1 | length 81
  Bottom Layer w15: P3.5 160.51,2540 R26.1
NetP3_6: P3.6 R23.1 | length 90.3
  Bottom Layer w15: P3.6 211.11,2645 223.24,2632.87 226.19,2632.87 234.44,2624.62 R23.1
NetP3_7: P3.7 R20.1 | length 97.9
  Bottom Layer w15: P3.7 158.67,2741.84 195.93,2741.84 223.24,2714.53 226.19,2714.53 234.44,2706.29 R20.1
NetP3_8: P3.8 R17.1 | length 105.5
  Bottom Layer w15: P3.8 163.94,2836.57 182.87,2836.57 223.24,2796.2 226.19,2796.2 234.44,2787.95 R17.1
NetP4_1: P4.1 R39.1 | length 111.5
  Bottom Layer w15: P4.1 1180.36,3757.97 1180.36,3751.72 1220.32,3711.76 1220.32,3708.81 1228.57,3700.56 R39.1
NetP4_2: P4.2 R36.1 | length 102.4
  Bottom Layer w15: P4.2 1308.31,3730.02 1308.31,3705.91 R36.1
NetP4_3: P4.3 R33.1 | length 95
  Bottom Layer w15: P4.3 1395.81,3742.52 R33.1
NetP4_4: P4.4 R30.1 | length 87.6
  Bottom Layer w15: P4.4 1458.33,3768.81 1477.95,3749.19 R30.1
NetP4_5: P4.5 R27.1 | length 80.2
  Bottom Layer w15: P4.5 1560.1,3778.24 R27.1
NetP4_6: P4.6 R24.1 | length 86.1
  Bottom Layer w15: R24.1 1642.24,3751.98 1658.33,3768.08 P4.6
NetP4_7: P4.7 R21.1 | length 93.5
  Bottom Layer w15: R21.1 1732.28,3708.46 1732.28,3749.19 1758.33,3775.24 P4.7
NetP4_8: P4.8 R18.1 | length 100.9
  Bottom Layer w15: R18.1 1808.35,3702.39 1808.35,3730.02 P4.8
NetP5_1: P5.1 R40.1 | length 121.7
  Bottom Layer w15: R40.1 3595.56,3597.95 3603.81,3606.2 3606.76,3606.2 3657.97,3657.41 3657.97,3657.97 P5.1
NetP5_2: P5.2 R37.1 | length 116.9
  Bottom Layer w15: R37.1 3595.56,3508.67 3603.81,3516.92 3616.92,3516.92 P5.2
NetP5_3: P5.3 R34.1 | length 110.8
  Bottom Layer w15: R34.1 3603.26,3424.13 3624.13,3424.13 P5.3
NetP5_4: P5.4 R31.1 | length 106.3
  Bottom Layer w15: R31.1 3627.14,3327.14 P5.4
NetP5_5: P5.5 R28.1 | length 101.9
  Bottom Layer w15: R28.1 3637.86,3237.86 P5.5
NetP5_6: P5.6 R25.1 | length 97.5
  Bottom Layer w15: R25.1 3648.57,3148.57 P5.6
NetP5_7: P5.7 R22.1 | length 93
  Bottom Layer w15: R22.1 3649.19,3059.29 3669.9,3080 P5.7
NetP5_8: P5.8 R19.1 | length 88.6
  Bottom Layer w15: R19.1 3658.08,2970 3668.08,2980 P5.8
NetP6_1: P6.1 R62.1 | length 97
  Bottom Layer w15: P6.1 195.51,3015 228.88,3015 R62.1
NetP6_2: P6.2 R59.1 | length 90.8
  Bottom Layer w15: P6.2 156.33,3075 186.33,3105 R59.1
NetP6_3: P6.3 R56.1 | length 84.6
  Bottom Layer w15: P6.3 167.43,3175 182.43,3190 R56.1
NetP6_4: P6.4 R53.1 | length 78.4
  Bottom Layer w15: P6.4 R53.1
NetP6_5: P6.5 R50.1 | length 84.6
  Bottom Layer w15: P6.5 167.43,3375 182.43,3360 R50.1
NetP6_6: P6.6 R47.1 | length 92.5
  Bottom Layer w15: P6.6 203.88,3475 222.68,3456.2 225.63,3456.2 233.88,3447.95 R47.1
NetP6_7: P6.7 R44.1 | length 98.7
  Bottom Layer w15: P6.7 160.62,3569.9 193.99,3569.9 222.68,3541.2 225.63,3541.2 233.88,3532.95 R44.1
NetP6_8: P6.8 R41.1 | length 104.9
  Bottom Layer w15: P6.8 163.94,3666.57 183.01,3666.57 223.38,3626.2 225.63,3626.2 233.88,3617.95 R41.1
NetP7_1: P7.1 R63.1 | length 106.4
  Bottom Layer w15: P7.1 2034.68,3726.99 2034.68,3708.81 2042.93,3700.56 R63.1
NetP7_2: P7.2 R60.1 | length 99
  Bottom Layer w15: P7.2 2128.81,3732.86 R60.1
NetP7_3: P7.3 R57.1 | length 92.5
  Bottom Layer w15: P7.3 2213.1,3748.57 R57.1
NetP7_4: P7.4 R54.1 | length 85.9
  Bottom Layer w15: P7.4 2281.67,3768.08 2297.38,3752.36 R54.1
NetP7_5: P7.5 R51.1 | length 79.4
  Bottom Layer w15: R51.1 P7.5
NetP7_6: P7.6 R48.1 | length 85.9
  Bottom Layer w15: R48.1 2465.95,3752.36 2481.67,3768.08 P7.6
NetP7_7: P7.7 R45.1 | length 92.5
  Bottom Layer w15: R45.1 2550.24,3748.57 P7.7
NetP7_8: P7.8 R42.1 | length 100.7
  Bottom Layer w15: R42.1 2637.48,3700.56 2645.72,3708.81 2645.72,3711.76 2676.03,3742.06 2676.03,3774.36 P7.8
NetP8_1: P8.1 R64.1 | length 102.6
  Bottom Layer w15: R64.1 3635,2815 P8.1
NetP8_2: P8.2 R61.1 | length 99.4
  Bottom Layer w15: R61.1 3642.86,2722.86 P8.2
NetP8_3: P8.3 R58.1 | length 96.1
  Bottom Layer w15: R58.1 3649.19,2630.71 3678.47,2660 P8.3
NetP8_4: P8.4 R55.1 | length 92.9
  Bottom Layer w15: R55.1 3649.19,2538.57 3670.61,2560 P8.4
NetP8_5: P8.5 R52.1 | length 89.6
  Bottom Layer w15: R52.1 3654.51,2446.43 3668.08,2460 P8.5
NetP8_6: P8.6 R49.1 | length 86.4
  Bottom Layer w15: R49.1 3674.29,2354.29 P8.6
NetP8_7: P8.7 R46.1 | length 84.9
  Bottom Layer w15: R46.1 3677.86,2262.14 P8.7
NetP8_8: P8.8 R43.1 | length 88.1
  Bottom Layer w15: R43.1 3658.08,2170 3668.08,2160 P8.8
NetP9_1: P9.1 Q2.3 | length 685.6
  Bottom Layer w30: Q2.3 1005.94,1739.06 1062,1683 1332.94,1683 1450,1565.94 P9.1
NetP9_2: P9.2 Q4.3 | length 582.6
  Bottom Layer w30: Q4.3 1160.94,1783.03 1169.19,1774.78 1171.16,1774.78 1222.94,1723 1352,1723 1552,1523 1552,1444 P9.2
NetP9_3: P9.3 Q6.3 | length 513.6
  Bottom Layer w30: Q6.3 1370.94,1785 1650,1505.94 P9.3
NetP9_4: P9.4 Q8.3 | length 459.7
  Bottom Layer w30: Q8.3 1470.94,1783.03 1479.19,1774.78 1481.16,1774.78 1750,1505.94 P9.4
NetP9_5: P9.5 Q7.3 | length 437
  Bottom Layer w30: Q7.3 1625.94,1783.03 1634.19,1774.78 1636.16,1774.78 1850,1560.94 P9.5
NetP9_6: P9.6 Q5.3 | length 414.2
  Bottom Layer w30: Q5.3 1780.94,1783.03 1789.19,1774.78 1791.16,1774.78 1950,1615.94 P9.6
NetP9_7: P9.7 Q3.3 | length 391.4
  Bottom Layer w30: Q3.3 1935.94,1783.03 1944.19,1774.78 1946.16,1774.78 2050,1670.94 P9.7
NetP9_8: P9.8 Q1.3 | length 368.6
  Bottom Layer w30: Q1.3 2090.94,1783.03 2099.19,1774.78 2101.16,1774.78 2150,1725.94 P9.8
NetP10_1: P10.1 U10.26 | length 3031.8
  Top Layer w15: P10.1 1120,2279.56 1161.51,2321.07 1821.05,2321.07 1982.83,2482.86 2557.52,2482.86 2557.57,2482.81 2558.86,2482.81 v1(2559,2482.66)
  Bottom Layer w15: U10.26 2310,2853 2392,2771 2791,2771 2877,2685 2877,2546 2813.29,2482.29 2559.58,2482.29 2559.2,2482.66 v1(2559,2482.66)
NetP10_2: P10.2 R73.2 | length 129.2
  Top Layer w15: P10.2 1266.37,2279.56 R73.2
NetQ1_1: Q1.1 R65.2 | length 338.5
  Bottom Layer w15: R65.2 1813.11,2010.44 1821.36,2002.19 1821.36,1999.24 1864.6,1956 2017,1956 2050,1923 2050,1867.28 Q1.1
NetQ2_1: Q2.1 R66.2 | length 357.8
  Bottom Layer w15: Q2.1 970,1865.2 970,1923 1020.5,1973.5 1193.06,1973.5 1218.8,1999.24 1218.8,2002.19 1227.05,2010.44 R66.2
NetQ3_1: Q3.1 R67.2 | length 282.6
  Bottom Layer w15: R67.2 1734.72,2002.84 1727.78,2002.84 1727.13,2002.19 1727.13,1976.82 1780.94,1923 1874.09,1923 1898.54,1898.54 Q3.1
NetQ4_1: Q4.1 R68.2 | length 292.3
  Bottom Layer w15: Q4.1 1123.54,1899.71 1132.33,1908.5 1156.66,1908.5 1179.66,1931.5 1268.5,1931.5 1315,1978 R68.2
NetQ5_1: Q5.1 R69.2 | length 187.9
  Bottom Layer w15: R69.2 1648.02,2006.51 1648.02,1980.98 1736.76,1892.24 1736.76,1870.52 Q5.1
NetQ6_1: Q6.1 R70.2 | length 196.2
  Bottom Layer w15: Q6.1@1278.98,1863.74 1278.98,1866.14 1286.79,1873.96 1289.19,1873.96 1395,1979.76 R70.2
NetQ7_1: Q7.1 R71.2 | length 158.1
  Bottom Layer w15: R71.2 1561.06,1952.48 1588.54,1925 Q7.1
NetQ8_1: Q8.1 R72.2 | length 165.1
  Bottom Layer w15: Q8.1 1433.54,1925 1478.03,1969.49 R72.2
NetR1_2: R1.2 U2.7 | length 172.6
  Bottom Layer w15: U2.7 908.21,3537.43 908.21,3574.21 926,3592 972,3592 995,3615 R1.2
NetR2_2: R2.2 U3.7 | length 263.1
  Bottom Layer w15: U3.7 3216,3539.61 3246.59,3570.2 3278.14,3570.2 3278.34,3570 3338.56,3570 3402.8,3634.24 3402.8,3637.19 3411.05,3645.44 R2.2
NetR3_2: R3.2 U2.6 | length 136.7
  Bottom Layer w15: U2.6 858.65,3537.87 858.65,3572.65 873,3587 883,3587 909.29,3613.29 R3.2
NetR4_2: R4.2 U3.6 | length 241.2
  Bottom Layer w15: U3.6 3168.58,3522.8 3168.58,3543.94 3222.6,3597.95 3301.95,3597.95 3318.51,3614.51 3318.51,3637.19 3326.76,3645.44 R4.2
NetR5_2: R5.2 U2.5 | length 116.1
  Bottom Layer w15: U2.5 808.65,3537.87 808.65,3572.08 823.57,3587 R5.2
NetR6_2: R6.2 U3.5 | length 192
  Bottom Layer w15: U3.5 3116,3538.56 3119.98,3542.54 3126.2,3542.54 3220.85,3637.19 3237.18,3637.19 R6.2
NetR7_2: R7.2 U2.4 | length 117.1
  Bottom Layer w15: R7.2 737.86,3582.22 755.35,3564.72 755.35,3537.87 U2.4
NetR8_2: R8.2 U3.4 | length 183.3
  Bottom Layer w15: U3.4 3067.65,3521.87 3067.65,3552.51 3095.13,3580 3127,3580 3161.14,3614.14 R8.2
NetR9_2: R9.2 U2.3 | length 131.9
  Bottom Layer w15: R9.2 652.14,3620.86 705.35,3567.65 705.35,3537.87 U2.3
NetR10_2: R10.2 U3.3 | length 150.4
  Bottom Layer w15: U3.3 3018.82,3523.04 3018.82,3543.71 3076.86,3601.75 R10.2
NetR11_2: R11.2 U2.2 | length 169.6
  Bottom Layer w15: R11.2 565,3615 587,3593 625,3593 652.69,3565.31 652.69,3563.53 657,3559.22 U2.2
NetR12_2: R12.2 U3.2 | length 136.2
  Bottom Layer w15: U3.2 2966,3563.98 2992.57,3590.55 R12.2
NetR13_2: R13.2 U2.1 | length 190.4
  Bottom Layer w15: R13.2 480.71,3613.18 557.68,3536.22 U2.1
NetR14_2: R14.2 U3.1 | length 128.4
  Bottom Layer w15: R14.2 2908.29,3614.14 2916,3606.43 U3.1
NetR15_2: R15.2 U2.15 | length 474.7
  Bottom Layer w15: R15.2 395,3604 524,3475 583,3475 656.76,3401.24 656.76,3314.02 U2.15
NetR16_2: R16.2 U3.15 | length 406.5
  Bottom Layer w15: R16.2 2824,3523.48 2966,3381.48 U3.15
NetR17_2: R17.2 U4.7 | length 200.4
  Bottom Layer w15: R17.2 420,2785 435,2770 U4.7
NetR18_2: R18.2 U5.7 | length 229.5
  Bottom Layer w15: U5.7 1671.65,3537.87 1671.65,3572.65 1686,3587 1794.74,3587 1806.52,3598.79 R18.2
NetR19_2: R19.2 U6.7 | length 249.5
  Bottom Layer w15: U6.7 3506.81,2890 3540.44,2923.63 R19.2
NetR20_2: R20.2 U4.6 | length 202.9
  Bottom Layer w15: R20.2 289.56,2706.29 297.81,2714.53 301.13,2714.53 306.59,2720 U4.6
NetR21_2: R21.2 U5.6 | length 164.7
  Bottom Layer w15: U5.6 1620,3558.92 1674.08,3613 1691.94,3613 1713.18,3634.24 1713.18,3637.19 1721.43,3645.44 R21.2
NetR22_2: R22.2 U6.6 | length 262.4
  Bottom Layer w15: U6.6 3461.67,2940 3487.86,2966.18 3487.86,3006.7 R22.2
NetR23_2: R23.2 U4.5 | length 214.2
  Bottom Layer w15: R23.2 337.89,2670 U4.5
NetR24_2: R24.2 U5.5 | length 152.1
  Bottom Layer w15: U5.5 1571.65,3537.87 1571.65,3571.65 1597.95,3597.95 1620,3597.95 1637.64,3615.59 1637.64,3640.84 R24.2
NetR25_2: R25.2 U6.5 | length 286.2
  Bottom Layer w15: U6.5 3435.31,2990 3457.19,3011.88 3457.19,3055 3532.19,3130 3532.19,3140.32 R25.2
NetR26_2: R26.2 U4.4 | length 229.1
  Bottom Layer w15: R26.2 289.56,2542.95 297.81,2551.2 300.76,2551.2 369.56,2620 U4.4
NetR27_2: R27.2 U5.4 | length 125.8
  Bottom Layer w15: U5.4 1521.59,3537.81 1521.59,3573.83 1558.33,3610.57 1558.33,3643.68 R27.2
NetR28_2: R28.2 U6.4 | length 330.5
  Bottom Layer w15: U6.4 3410,3040 3432.19,3062.19 3432.19,3099.52 3495,3162.33 3495,3226.22 3506.64,3237.86 R28.2
NetR29_2: R29.2 U4.3 | length 242.2
  Bottom Layer w15: R29.2 289.56,2461.29 297.81,2469.53 300.76,2469.53 401.23,2570 U4.3
NetR30_2: R30.2 U5.3 | length 112.5
  Bottom Layer w15: U5.3 1470,3582.22 1477.95,3590.17 R30.2
NetR31_2: R31.2 U6.3 | length 326.3
  Bottom Layer w15: U6.3 3369.56,3090 3376.2,3096.64 3376.2,3098.34 3457,3179.14 3457,3240.75 3540.44,3324.19 R31.2
NetR32_2: R32.2 U4.2 | length 265.8
  Bottom Layer w15: R32.2 292,2379.11 292,2400 412,2520 U4.2
NetR33_2: R33.2 U5.2 | length 119.2
  Bottom Layer w15: R33.2 1395.81,3597.95 1419.18,3574.59 1419.18,3537.05 U5.2
NetR34_2: R34.2 U6.2 | length 385.5
  Bottom Layer w15: U6.2 3369.56,3140 3376.2,3146.64 3376.2,3148.53 3420,3192.33 3420,3247.01 3457.19,3284.21 3457.19,3367.19 3506.43,3416.43 R34.2
NetR35_2: R35.2 U4.1 | length 311.6
  Bottom Layer w15: R35.2 290.09,2294.47 321.51,2294.47 330.29,2303.25 330.29,2379.11 421.19,2470 U4.1
NetR36_2: R36.2 U5.1 | length 140.2
  Bottom Layer w15: R36.2 1313.67,3610.33 1332.71,3591.29 1345.71,3591.29 1368.35,3568.65 1368.35,3537.87 U5.1
NetR37_2: R37.2 U6.1 | length 395.8
  Bottom Layer w15: U6.1 3351.22,3226.22 3423,3298 3423,3388.27 3529.24,3494.51 3532.19,3494.51 3540.44,3502.76 R37.2
NetR38_2: R38.2 U4.15 | length 600.7
  Bottom Layer w15: R38.2 322,2215 366,2259 366,2357.44 449.25,2440.69 520.09,2440.69 599.4,2520 U4.15
NetR39_2: R39.2 U5.15 | length 432.1
  Bottom Layer w15: R39.2@1234.95,3644.97 1234.95,3559.6 1328.55,3466 1370,3466 1419.51,3416.49 1419.51,3314.27 U5.15
NetR40_2: R40.2 U6.15 | length 689.6
  Bottom Layer w15: U6.15 3213.14,3140 3386.91,3313.78 3386.91,3403.91 3500.43,3517.43 3500.43,3580 3510.98,3590.55 3535.99,3590.55 R40.2
NetR41_2: R41.2 U7.7 | length 609
  Bottom Layer w15: R41.2 289.13,3614.87 318.46,3614.87 559,3374.33 559,3221 533,3195 U7.7
NetR42_2: R42.2 U8.7 | length 170.6
  Bottom Layer w15: U8.7 2540,3557.98 2569.02,3587 2607.01,3587 2634.52,3614.51 R42.2
NetR43_2: R43.2 U9.7 | length 339.4
  Bottom Layer w15: U9.7 3374.22,2390 3378.53,2385.69 3379.31,2385.69 3420,2345 3420,2245 3495,2170 R43.2
NetR44_2: R44.2 U7.6 | length 519.8
  Bottom Layer w15: R44.2 291,3528 365,3528 433.8,3459.2 433.8,3176.64 465.44,3145 U7.6
NetR45_2: R45.2 U8.6 | length 134.2
  Bottom Layer w15: U8.6 2490,3557.39 2548.59,3615.98 2548.59,3643.79 R45.2
NetR46_2: R46.2 U9.6 | length 313.1
  Bottom Layer w15: U9.6 3395,2440 3399.99,2435.01 3450,2385 3450,2300 3487.86,2262.14 R46.2
NetR47_2: R47.2 U7.5 | length 473.2
  Bottom Layer w15: R47.2 340.94,3445 408.8,3377.14 408.8,3149.31 460.29,3097.82 480.96,3097.82 U7.5
NetR48_2: R48.2 U8.5 | length 120
  Bottom Layer w15: U8.5 2441.65,3537.87 2441.65,3573.65 2465.95,3597.95 R48.2
NetR49_2: R49.2 U9.5 | length 247.6
  Bottom Layer w15: U9.5 3396.43,2490 3520.94,2365.49 3532.63,2365.49 3540.88,2357.24 R49.2
NetR50_2: R50.2 U7.4 | length 435
  Bottom Layer w15: R50.2 291.95,3362.95 330.29,3362.95 383.8,3309.45 383.8,3126.2 465,3045 U7.4
NetR51_2: R51.2 U8.4 | length 112.7
  Bottom Layer w15: R51.2 2381.67,3590.55 2390,3582.22 U8.4
NetR52_2: R52.2 U9.4 | length 228.4
  Bottom Layer w15: U9.4 3407.86,2540 3501.43,2446.43 R52.2
NetR53_2: R53.2 U7.3 | length 396.8
  Bottom Layer w15: R53.2 291.25,3277.25 318.46,3277.25 358.8,3236.91 358.8,3093.2 455.35,2996.65 482.13,2996.65 U7.3
NetR54_2: R54.2 U8.3 | length 135.2
  Bottom Layer w15: R54.2 2297.38,3610.57 2310,3597.95 2324.26,3597.95 2340,3582.22 U8.3
NetR55_2: R55.2 U9.3 | length 211
  Bottom Layer w15: U9.3 3437.86,2590 3487.86,2540 3539.45,2540 R55.2
NetR56_2: R56.2 U7.2 | length 355.4
  Bottom Layer w15: R56.2 289.25,3189.75 321.21,3189.75 330,3180.97 330,3080 438.35,2971.65 465,2945 U7.2
NetR57_2: R57.2 U8.2 | length 154.5
  Bottom Layer w15: R57.2 2213.1,3615.9 2227,3602 2250,3602 2285.69,3566.31 2285.69,3563.53 2290,3559.22 U8.2
NetR58_2: R58.2 U9.2 | length 194.1
  Bottom Layer w15: U9.2 3532.63,2640 3540.88,2631.75 R58.2
NetR59_2: R59.2 U7.1 | length 317.3
  Bottom Layer w15: R59.2 292,3102 292,3080 420,2952 420,2913.35 438.35,2895 U7.1
NetR60_2: R60.2 U8.1 | length 194.2
  Bottom Layer w15: R60.2 2128.81,3613 2164.81,3577 2231.21,3577 2240,3568.21 U8.1
NetR61_2: R61.2 U9.1 | length 203.3
  Bottom Layer w15: U9.1 3421.43,2690 3451.33,2719.9 3537.93,2719.9 R61.2
NetR62_2: R62.2 U7.15 | length 543.6
  Bottom Layer w15: R62.2 292,3017 292,2971.65 401.65,2862 555,2862 638,2945 U7.15
NetR63_2: R63.2 U8.15 | length 460.4
  Bottom Layer w15: R63.2 2044.52,3610.33 2168.62,3486.24 2214.76,3486.24 2289.51,3411.49 2289.51,3314.27 U8.15
NetR64_2: R64.2 U9.15 | length 484.6
  Bottom Layer w15: U9.15 3185,2640 3285,2740 3420,2740 3495,2815 R64.2
NetR74_2: R74.2 U11.3 | length 145
  Bottom Layer w15: R74.2 732.95,1493.91 741.2,1485.66 741.2,1482.71 743,1480.91 v1(743,1356)
NetU1_14: U1.14 U4.9 | length 1283.5
  Top Layer w15: v1(835,2820) 835,2531 850,2516 1346.67,2516 1381.3,2481.37 v1(1650,2481.37)
  Bottom Layer w15: U4.9 v1(835,2820) ; U1.14 v1(1650,2481.37)
NetU2_9: U2.9 U7.14 | length 556
  Top Layer w15: v1(768,2996) 768,3241.88 790.12,3264 v1(957,3264)
  Bottom Layer w15: U7.14 707.22,2996 v1(768,2996) ; v1(957,3264) U2.9
NetU2_14: U2.14 U5.9 | length 1220.4
  Top Layer w15: v1(707.22,3416.49) 707.42,3416.49 709.06,3418.12 1480.51,3418.12 1480.88,3417.75 v1(1720,3417.75)
  Bottom Layer w15: U2.14 707.22,3314 v1(707.22,3416.49) ; U5.9 v1(1720,3417.75)
NetU3_9: U3.9 U8.14 | length 1151.6
  Top Layer w15: v1(2340,3418.51) 2340.2,3418.51 2340.7,3419 3264.8,3419 3265.8,3418 v1(3266,3418)
  Bottom Layer w15: U8.14 v1(2340,3418.51) ; U3.9 v1(3266,3418)
NetU3_14: U3.14 U6.9 | length 1080.7
  Top Layer w15: v1(3018,3392.37) 3299.84,3392.37 3318.51,3373.7 3318.51,3276.51 3241.37,3199.37 v1(3241.37,2842)
  Bottom Layer w15: U3.14 3016,3354.5 3018,3356.5 v1(3018,3392.37) ; U6.9 3239.17,2840 3241.17,2842 v1(3241.37,2842)
NetU4_14: U4.14 U7.9 | length 872.8
  Top Layer w15: v1(807,2570) v1(807,3238.63)
  Bottom Layer w15: U4.14 v1(807,2570) ; U7.9 800.42,3245 806.8,3238.63 v1(807,3238.63)
NetU5_14: U5.14 U8.9 | length 1277.7
  Top Layer w15: v1(1470,3392.75) 1507.5,3392.75 1507.87,3392.37 v1(2590,3392.37)
  Bottom Layer w15: U5.14 v1(1470,3392.75) ; U8.9 v1(2590,3392.37)
NetU6_14: U6.14 U9.9 | length 924.2
  Top Layer w15: v1@3216,2340.2 v1(3216,3090)
  Bottom Layer w15: U9.9 v1(3216,2340) ; U6.14 v1(3216,3090)
NetU9_14: U9.14 U10.32 | length 1811.2
  Top Layer w15: U10.32 1860,3045 1860,2829 1962,2727 2805.11,2727 2916,2616.11 v1(2916,2590)
  Bottom Layer w15: v1(2916,2590) U9.14
RESET: R75.2 S1.1 U11.1 | length 940
  Bottom Layer w15: R75.2 584,1488.91 v1(584,1353) 584,1334 615,1303 1186,1303 1264.87,1381.87 1311.43,1381.87 S1.1
RXD0: P11.3 S2.2 U11.21 | length 795.1
  Top Layer w15: S2.2 573.09,2006.91 620.55,2006.91 647.03,1980.43 647.03,1961.4 U11.21
  Bottom Layer w15: S2.2 530,2159.51 590.49,2220 890,2220 933,2177 P11.3
TXD0: P11.2 S2.1 U11.22 | length 946.3
  Top Layer w15: S2.1 430,2008.46 456,1982.46 532.23,1982.46 547.07,1967.61 568.29,1967.61 584.41,1951.49 U11.22
  Bottom Layer w15: S2.1 430,2173.44 501.56,2245 890,2245 920,2275 P11.2
UART1_RX: S2.10 U10.7 | length 1399.2
  Bottom Layer w15: S2.10 495.69,2415.69 540.69,2415.69 561,2436 809.71,2436 852,2478.29 852,2651 895,2694 1470,2694 1510,2654 U10.7
UART1_TX: S2.9 U10.6 | length 990.8
  Bottom Layer w15: S2.9 530,2351 579,2400 821.37,2400 916.37,2495 1310,2495 1378.91,2563.91 1393.83,2563.91 1410,2580.08 U10.6
VCC: F1.1 JDC1.1 R79.1 | length 526.5
  Top Layer w15: F1.1 3510.68,1482.45 3533.69,1459.44 R79.1
  Top Layer w30: JDC1.1 3360,1697 3408,1649 3474,1649 3510.68,1612.32 F1.1
pads on no net: H1.1 H2.1 H3.1 H4.1 JDC1.3 U1.9 U10.1 U10.2 U10.3 U10.4 U10.5 U10.8 U10.9 U10.10 U10.11 U10.12 U10.13 U10.14 U10.15 U10.16 U10.17 U10.21 U10.22 U10.23 U10.24 U10.25 U10.27 U10.28 U10.29 U10.33 U10.34 U10.35 U10.36 U10.37 U11.2 U11.4 U11.5 U11.6 U11.7 U11.9 U11.10 U11.11 U11.12 U11.13 U11.14 U11.19 U11.20

## Keep-outs
Keep-Out Layer:
  the board outline again, w10

## Text inside footprints (layer, text, board x,y; h text height)
S2: Top Overlay "5" at 815.43,2089.76 h40; Top Overlay "4" at 715.43,2089.76 h40; Top Overlay "3" at 615.43,2089.76 h40; Top Overlay "ON" at 398.5,2270.87 h40; Top Overlay "1" at 420.94,2089.76 h40; Top Overlay "2" at 515.43,2089.76 h40; Mechanical 13 "5" at 815.43,2089.76 h40; Mechanical 13 "4" at 715.43,2089.76 h40; Mechanical 13 "3" at 615.43,2089.76 h40; Mechanical 13 "1" at 420.94,2089.76 h40; Mechanical 13 "ON" at 398.5,2270.87 h40; Mechanical 13 "2" at 515.43,2089.76 h40